# EAGLE board L_meterbrd (EAGLE 6.1)
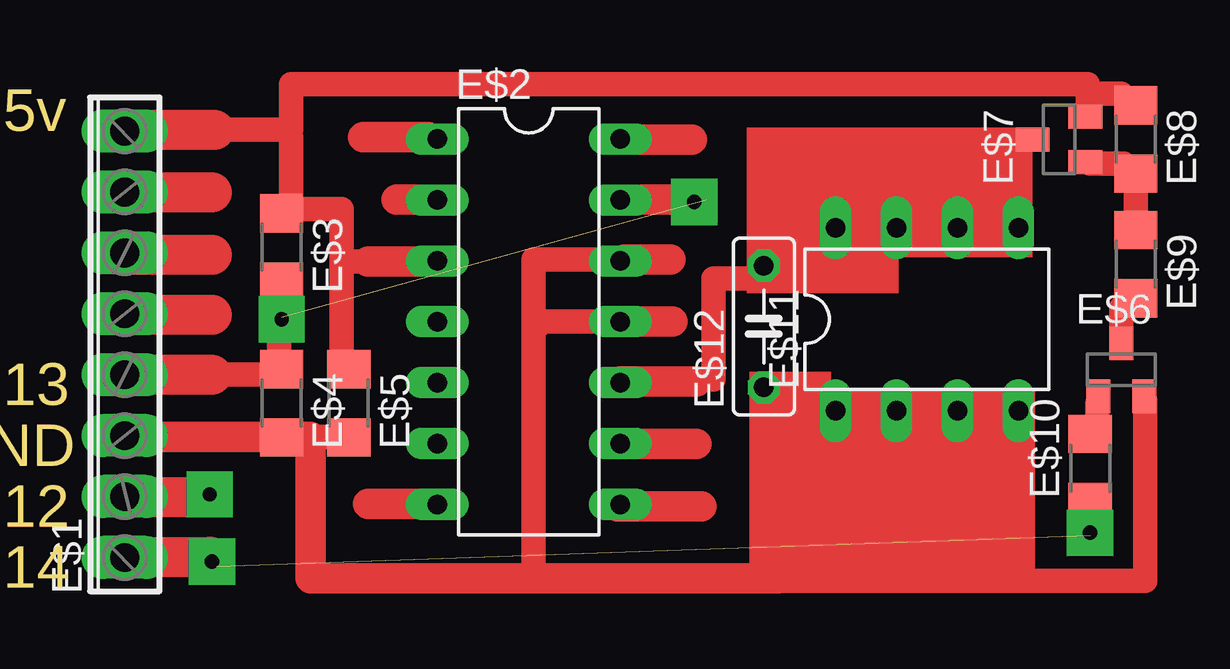
[diagram p0: board, top side]
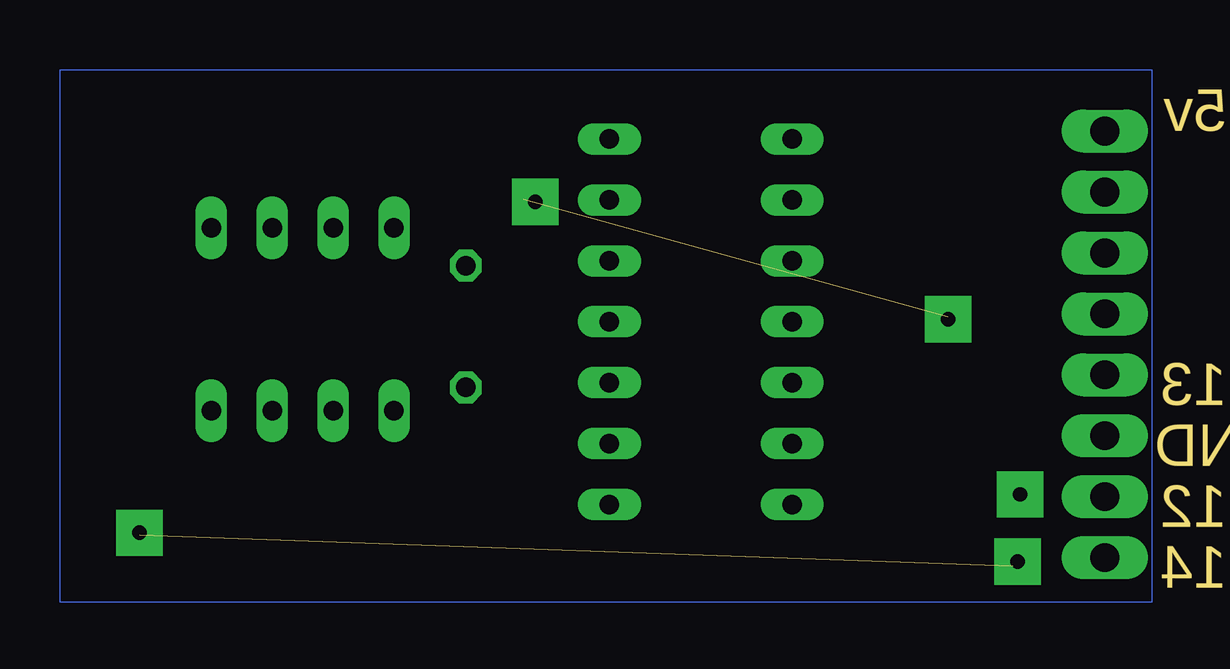
[diagram p1: board, bottom side, seen from below]

Size 36.4 x 15.3 mm. Coordinates in mm from the lower left corner, seen from the top.
Outline: 2.7,10.4 20.4,15.3
Outline: 0,0 36.4,1.3
Copper layers (1*16): Top 0.035mm / dielectric 1.5mm / Bottom 0.035mm
Design rules: minimum track width 10mil, minimum drill 24mil, track to track 8mil, track to pad 8mil, pad to pad 8mil, via to via 8mil, smd to smd 8mil, copper to edge 40mil, drill to drill 8mil, minimum pad ring 10mil, minimum via ring 8mil, stop-mask expansion 4mil, vias tented up to drill 0mil, thermal gap 10mil

## Footprints (pad centres in the part's own frame; a part is rotated, then mirrored left to right if it is on the bottom)
8POL254 = drill 1.2 long: 1 -8.89,0; 2 -6.35,0; 3 -3.81,0; 4 -1.27,0; 5 1.27,0; 6 3.81,0; 7 6.35,0; 8 8.89,0
DIL14 = drill 0.813 long: 1 -7.62,-3.81; 2 -5.08,-3.81; 3 -2.54,-3.81; 4 0,-3.81; 5 2.54,-3.81; 6 5.08,-3.81; 7 7.62,-3.81; 8 7.62,3.81; 9 5.08,3.81; 10 2.54,3.81; 11 0,3.81; 12 -2.54,3.81; 13 -5.08,3.81; 14 -7.62,3.81
R1206 = smd 1.6 x 1.803: 1 -1.422,0; 2 1.422,0
SOT23 = smd 1 x 1.4: 1 -0.95,-1.1; 2 0.95,-1.1; 3 0,1.1
DIL08 = drill 0.813 long: 1 -3.81,-3.81; 2 -1.27,-3.81; 3 1.27,-3.81; 4 3.81,-3.81; 5 3.81,3.81; 6 1.27,3.81; 7 -1.27,3.81; 8 -3.81,3.81
C050-025X075 = drill 0.813 octagon: 1 -2.54,0; 2 2.54,0

## Placement (x,y rotation side)
E$1  [8POL254]  -3.84,9.26 90 top  (outside the outline)
E$2  [DIL14]  13,10.2 270 top
E$3  [R1206]  2.7,13.3 270 top
E$4  [R1206]  2.7,6.8 270 top
E$5  [R1206]  5.5,6.8 270 top
E$6  [SOT23]  37.7,8.2 0 top
E$7  [SOT23]  35.1,17.8 90 top
E$8  [R1206]  38.3,17.8 270 top
E$9  [R1206]  38.3,12.6 270 top
E$10  [R1206]  36.4,4.1 90 top
E$11  [DIL08]  29.6,10.3 0 top
E$12  [C050-025X075]  22.8,10 90 top

## Library data of the parts
E$1 = con-phoenix-254
E$2 E$11 = 40xx
E$3-E$5 E$8-E$10 E$12 = rcl
E$6 E$7 = transistor

## Tracks (layer width: path | path; a pad name or v marks a point on that pad's centre or on a via)
S$1
  Top 1.27: 16.7,2.5 20.2,2.5
S$2
  Top 1.016: 3.8,5.3 3.8,5.4 5.9,5.4
  Top 1.27: -3.8,5.4 3.8,5.4 3.9,5.4 3.9,-0.5 23.4,-0.5
S$3
  Top 1.27: 17.1,5.1 20,5.1
S$4
  Top 1.27: 8.9,2.6 6.3,2.6
S$5
  Top 1.016: 5.2,8.7 5.2,12.7
S$6
  Top 1.27: 16.8,7.7 20,7.7
S$7
  Top 1.27: 17.1,10.2 19,10.2
S$8
  Top 1.016: 36.7,6 36.7,6.8
S$9
  Top 1.016: 13.1,-0.6 38.7,-0.6 38.7,6.9
S$10
  Top 1.27: 17,12.8 18.9,12.8
S$11
  Top 1.27: 17.2,15.3 19.9,15.3
S$12
  Top 1.27: 16.9,17.8 19.8,17.8
S$13
  Top 1.27: 8.7,12.7 6.3,12.7
S$14
  Top 1.27: 9,15.3 7.5,15.3
S$15
  Top 1.27: 8.8,17.9 6.1,17.9
S$16
  Top 1.016: -0.3,18.2 3.1,18.2 3.1,20.1 36.3,20.1 36.3,19
  Top 1.676: -3.4,18.2 -0.3,18.2 -0.1,18.2
S$17
  Top 1.016: 13.2,-0.6 13.2,12.8 16.2,12.8
S$18
  Top 1.016: 37.7,9.6 37.7,10.8
S$19  (via drill 0.6 pad 1.93)
  other vias: 36.4,1.4
S$20  (via drill 0.6 pad 1.93)
  other vias: 19.9,15.2
S$21
  Top 1.016: 38.4,14.4 38.3,14.4 38.3,15.7
S$22
  Top 1.016: 36.7,19.7 37.7,19.7
S$23
  Top 1.016: 36.4,16.8 37.8,16.8 37.8,16.7
S$24
  Top 1.016: 22.9,12 20.7,12 20.7,7.8
S$25
  Top 1.016: 16.9,10.2 13.5,10.2 13.5,10.1
S$26
  Top 1.016: 2.6,10.5 2.6,8 -0.3,8
  Top 1.676: -0.2,8 -0.3,8 -3.5,8
S$27  (via drill 0.6 pad 1.93)
  other vias: -0.3,3
S$28  (via drill 0.6 pad 1.93)
  other vias: 2.7,10.3
S$29  (via drill 0.6 pad 1.93)
  other vias: -0.2,0.2
S$30
  Top 1.676: -3.5,13 -0.2,13
S$31
  Top 1.676: -3.5,15.6 -0.2,15.6
S$32
  Top 1.676: -3.5,10.5 -0.2,10.5
S$33
  Top 1.676: -3.5,2.9 -0.2,2.9
S$34
  Top 1.676: -3.6,0.4 -0.3,0.4
S$35
  Top 1.016: 6.3,12.7 5.2,12.7 5.2,14.9 3.1,14.9 3.1,17.9
S$36
  Bottom 0: 39.7,20.7 -5.8,20.7 -5.8,-1.5 39.7,-1.5 39.7,20.7
(copper drawn outside any net)
  shapes: Top area x7

## Text on the board
Dimension: 5v | 13 | GND | 12 | 14